# Altium PCB 封装.pcbdoc
Units mil, origin at the board's own origin, x right, y up, seen from the top; angles counter-clockwise.
Board outline 2850 x 1947.6 mil, 4 copper layers (Top Layer, Inner1, Inner2, Bottom Layer); 3 components, 86 nets, 100 pads, 0 vias.
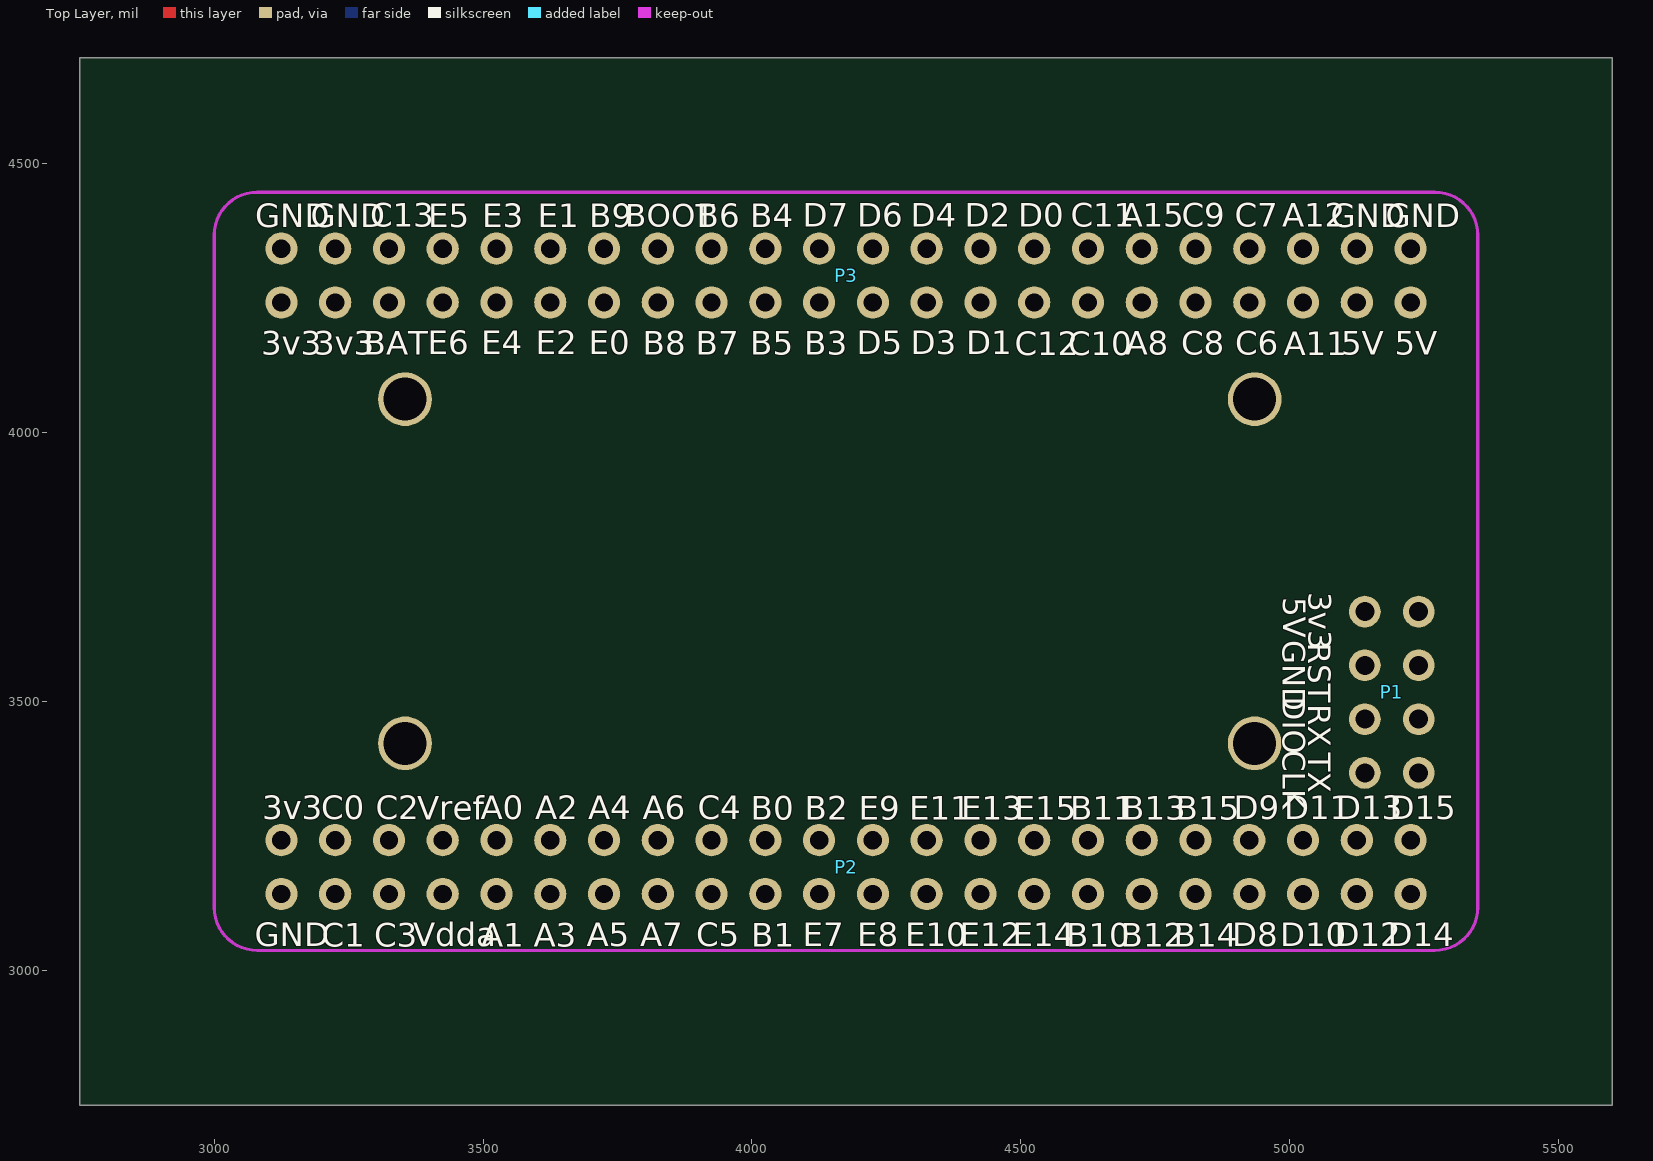
[diagram p0: Top Layer view]
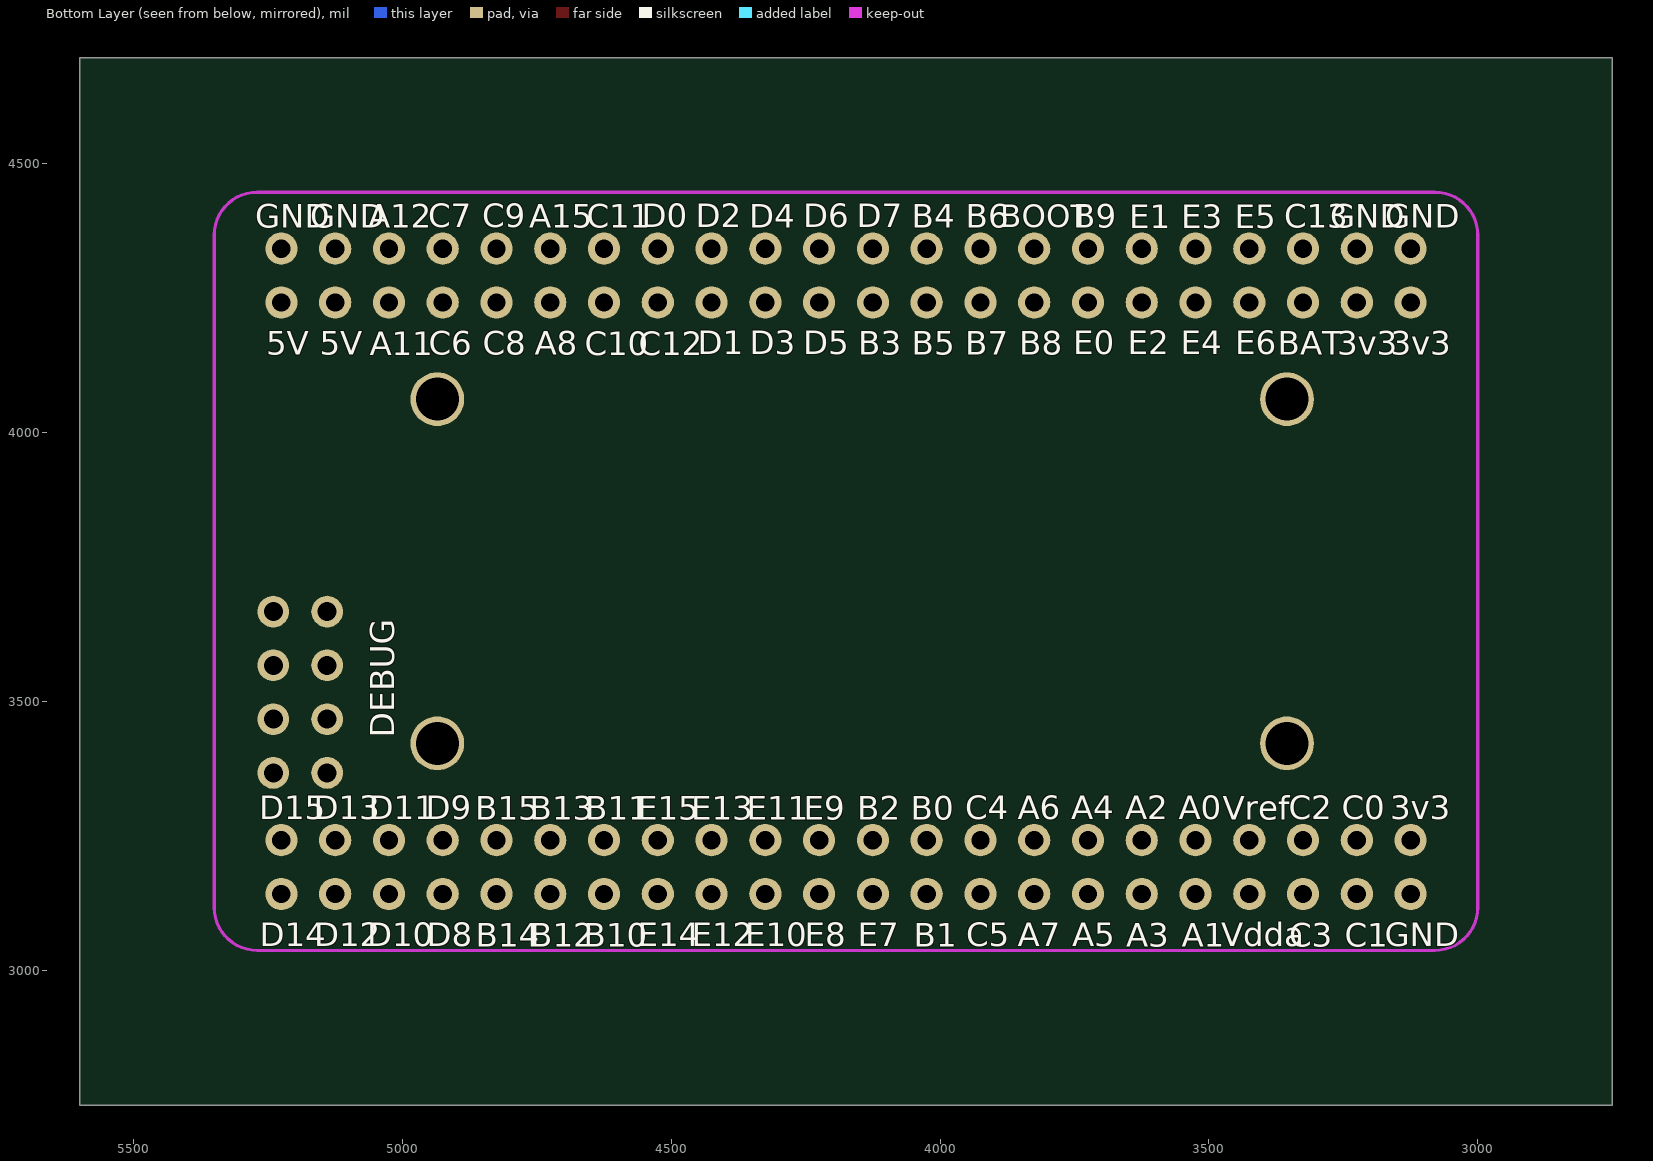
[diagram p1: Bottom Layer view, seen from below]

## Layer stack, top to bottom
Top Layer: signal copper (thickness not stored)
Dielectric: dielectric 12.6, FR-4, Dk 4.8
Inner1: signal copper (thickness not stored)
Dielectric: dielectric 12.6, FR-4, Dk 4.8
Inner2: signal copper (thickness not stored)
Dielectric: dielectric 12.6, FR-4, Dk 4.8
Bottom Layer: signal copper (thickness not stored)

## Board outline
5600,2750 2750,2750 2750,4697.6 5600,4697.6

## Design rules (kind name [scope] priority, off if disabled: settings)
Clearance copperThickness1oz [All] p1: gap=7 ignorepadtopadclearanceinfootprint=FALSE except(4: Track-Track; 5: Track-SMDPad SMDPad-SMDPad Track-THPad SMDPad-THPad THPad-THPad Track-Hole SMDPad-Hole THPad-Hole; 6: Track-Via SMDPad-Via THPad-Via Via-Via Track-Fill SMDPad-Fill THPad-Fill Via-Fill Fill-Fill SMDPad-Region THPad-Region Via-Region Fill-Region Region-Region Track-Poly SMDPad-Poly THPad-Poly Via-Poly Fill-Poly Poly-Poly Track-Text SMDPad-Text THPad-Text Via-Text Fill-Text Region-Text Poly-Text Text-Text Via-Hole Fill-Hole Region-Hole Poly-Hole Text-Hole; 11.8: Track-Region Region-Poly Track-Sheet SMDPad-Sheet THPad-Sheet Via-Sheet Fill-Sheet Region-Sheet Poly-Sheet Text-Sheet Sheet-Hole)
Clearance copperThickness2oz [All] p1: gap=7 ignorepadtopadclearanceinfootprint=FALSE except(6: Track-SMDPad SMDPad-SMDPad Track-THPad SMDPad-THPad THPad-THPad Track-Via SMDPad-Via THPad-Via Via-Via Track-Fill SMDPad-Fill THPad-Fill Via-Fill Fill-Fill SMDPad-Region THPad-Region Via-Region Fill-Region Region-Region Track-Poly SMDPad-Poly THPad-Poly Via-Poly Fill-Poly Poly-Poly Track-Text SMDPad-Text THPad-Text Via-Text Fill-Text Region-Text Poly-Text Text-Text Track-Hole SMDPad-Hole THPad-Hole Via-Hole Fill-Hole Region-Hole Poly-Hole Text-Hole; 8: Track-Track; 11.8: Track-Region Region-Poly Track-Sheet SMDPad-Sheet THPad-Sheet Via-Sheet Fill-Sheet Region-Sheet Poly-Sheet Text-Sheet Sheet-Hole)
DiffPairsRouting differentialPair [All] p1: maxuncoupledlength=10 maxlimit=6 mostfreqgap=6 toplayer_minwidth=5 toplayer_prefwidth=10 toplayer_maxwidth=100 bottomlayer_minwidth=5 bottomlayer_prefwidth=10 bottomlayer_maxwidth=100 midlayer1_minwidth=5 midlayer1_prefwidth=10 midlayer1_maxwidth=100 midlayer2_minwidth=5 midlayer2_prefwidth=10 midlayer2_maxwidth=100
PasteMaskExpansion pasteMaskExpansion [All] p1:
PlaneConnect innerPlane [All] p1: planeconnectstyle=Relief reliefexpansion=20 reliefentries=4 reliefconductorwidth=10 reliefairgap=10
PolygonConnect copperRegion [All] p1: connectstyle=Relief reliefentries=4 reliefconductorwidth=6 polygonreliefangle="90 Angle" airgapwidth=6
RoutingVias viaSize [All] p1: viastyle="Through Hole" holewidth=11.8 minholewidth=11.8 maxholewidth=248 width=17.7 minwidth=17.7 maxwidth=393.7
SolderMaskExpansion solderMaskExpansion [All] p1: useseparateexpansions=TRUE expansion=2 expansionbottom=2
Width copperThickness1oz [All] p1: maxlimit=100 minlimit=5 preferedwidth=10
Width copperThickness2oz [All] p1: maxlimit=100 minlimit=8 preferedwidth=10

## Components (designator, comment, footprint, x,y, rotation, side; value= is the part's Value field where it differs from the comment)
P1 "Header-Male-2.54_2x4" "HEADER 2*4" 5240,3367.6 r90 top
P2 "Header 2x22" "header 2x22" 4175,3192.6 r90 top
P3 "Header 2x22" "header 2x22" 4175,4292.6 r90 top

## Footprints (in the part's own frame and the unit in brackets; to place one, negate y for a bottom-side part, rotate by r counter-clockwise, add the part's x,y. Pads: shape width x height; smd on the part's side, far side on the other; paste and mask are expansions set on the pad)
"HEADER 2*4" [mm]
  round 1.5 hole 0.9: 1(0,0) 2(0,2.54) 3(2.54,0) 4(2.54,2.54) 5(5.08,0) 6(5.08,2.54) 7(7.62,0) 8(7.62,2.54)
"header 2x22" [mil]
  round 60 hole 34: 1(-50,1050) 2(50,1050) 3(-50,950) 4(50,950) 5(-50,850) 6(50,850) 7(-50,750) 8(50,750) 9(-50,650) 10(50,650) 11(-50,550) 12(50,550) 13(-50,450) 14(50,450) 15(-50,350) 16(50,350) 17(-50,250) 18(50,250) 19(-50,150) 20(50,150) 21(-50,50) 22(50,50) 23(-50,-50) 24(50,-50) 25(-50,-150) 26(50,-150) 27(-50,-250) 28(50,-250) 29(-50,-350) 30(50,-350) 31(-50,-450) 32(50,-450) 33(-50,-550) 34(50,-550) 35(-50,-650) 36(50,-650) 37(-50,-750) 38(50,-750) 39(-50,-850) 40(50,-850) 41(-50,-950) 42(50,-950) 43(-50,-1050) 44(50,-1050)

## Free pads (board coordinates)
  round 100 hole 80: 1(3355,3422.6) 1(3355,4062.6) 1(4935,3422.6) 1(4935,4062.6)

## Nets (pads, with @x,y where several pads share a name; then routed paths per layer and width w, separated by ;. In a path a pad name is that pad's centre, name@x,y a point inside that pad or via, vN(x,y) a via of type N, cw(c..) or ccw(c..) an arc to the next point about the centre after c; other vN are vias at no path point)
3V3: P1.7 P2.2 P3.1 P3.3
5V: P1.8 P3.41 P3.43
BAT: P3.5
BOOT: P3.16
EXT_ADC_CH1: P2.9
EXT_ADC_CH2: P2.10
EXT_I2C_SCL: P3.15
EXT_I2C_SDA: P3.14
EXT_RX: P3.13
EXT_SPI1_MISO: P3.8
EXT_SPI1_MOSI: P3.7
EXT_SPI1_SCK: P3.11
EXT_SPI2_MISO: P2.16
EXT_SPI2_MOSI: P2.15
EXT_SPI2_SCK: P2.13
EXT_TX: P3.12
GND: 
LED1: P2.4
LED2: P2.3
LED3: P2.6
NRST: P1.5
PA2: P2.12
PA3: P2.11
PA4: P2.14
PA8: P3.33
PA9: P1.1
PA10: P1.3
PA11: P3.39
PA12: P3.40
PA13: P1.4
PA14: P1.2
PA15: P3.34
PB0: P2.20
PB1: P2.19
PB2: P2.22
PB3: P3.21
PB4: P3.20
PB5: P3.19
PB6: P3.18
PB7: P3.17
PB10: P2.31
PB11: P2.32
PB12: P2.33
PB13: P2.34
PB14: P2.35
PB15: P2.36
PC3: P2.5
PC4: P2.18
PC5: P2.17
PC6: P3.37
PC7: P3.38
PC8: P3.35
PC9: P3.36
PC10: P3.31
PC11: P3.32
PC12: P3.29
PC13: P3.6
PD0: P3.30
PD1: P3.27
PD2: P3.28
PD3: P3.25
PD4: P3.26
PD5: P3.23
PD6: P3.24
PD7: P3.22
PD8: P2.37
PD9: P2.38
PD10: P2.39
PD11: P2.40
PD12: P2.41
PD13: P2.42
PD14: P2.43
PD15: P2.44
PE3: P3.10
PE4: P3.9
PE7: P2.21
PE8: P2.23
PE9: P2.24
PE10: P2.25
PE11: P2.26
PE12: P2.27
PE13: P2.28
PE14: P2.29
PE15: P2.30
VDDA: P2.7
VREF: P2.8
pads on no net: P1.6 P2.1 P3.2 P3.4 P3.42 P3.44

## Keep-outs
Board Outline Layer:
  lines w6: 3000,3117.6 3000,4367.6 cw(c3080,4367.6) 3080,4447.6 5270,4447.6 cw(c5270,4367.6) 5350,4367.6 5350,3117.6 cw(c5270,3117.6) 5270,3037.6 3080,3037.6 cw(c3080,3117.6) 3000,3117.6

## Silkscreen, mask and mechanical layers (free items; w line width, h text height)
Top Silkscreen Layer:
  text "BOOT" at 3764.89,4383.58 h42
  text "C7" at 4898.39,4383.6 h44
  text "GND" at 3076.56,4382.71 h44
  text "GND" at 3179.56,4382.71 h44
  text "C13" at 3289.89,4382.84 h44
  text "B9" at 3697.32,4382.58 h44
  text "B6" at 3897.82,4382.58 h44
  text "B4" at 3996.99,4382.58 h44
  text "D7" at 4094.76,4382.96 h44
  text "D6" at 4195.89,4382.96 h44
  text "D4" at 4295.02,4382.84 h44
  text "D2" at 4395.96,4382.96 h44
  text "D0" at 4495.12,4382.96 h44
  text "C11" at 4592.89,4382.84 h44
  text "A15" at 4685.82,4382.84 h44
  text "C9" at 4799.02,4383.35 h44
  text "A12" at 4986.39,4382.84 h44
  text "GND" at 5076.56,4382.71 h44
  text "GND" at 5178.56,4382.71 h44
  text "E5" at 3398.02,4381.95 h44
  text "E3" at 3498.76,4381.95 h44
  text "E1" at 3601.82,4381.95 h44
  text "E6" at 3397.62,4146 h44
  text "E4" at 3496.75,4146 h44
  text "E2" at 3597.72,4146 h44
  text "E0" at 3696.89,4146 h44
  text "D5" at 4194.55,4146 h44
  text "D3" at 4295.29,4146 h44
  text "D1" at 4398.32,4146 h44
  text "5V" at 5095.72,4145.6 h44
  text "5V" at 5195.72,4145.6 h44
  text "3v3" at 3087.39,4144.87 h44
  text "3v3" at 3186.39,4144.87 h44
  text "BAT" at 3278.09,4144.93 h44
  text "B8" at 3796.75,4145.07 h44
  text "B7" at 3895.82,4145.33 h44
  text "B5" at 3996.49,4145.2 h44
  text "B3" at 4097.22,4144.93 h44
  text "C10" at 4587.95,4144.67 h44
  text "A8" at 4695.15,4145.07 h44
  text "C8" at 4798.42,4145.07 h44
  text "C6" at 4898.62,4145.47 h44
  text "A11" at 4988.75,4144.53 h44
  text "C12" at 4488.82,4144.4 h44
  text "3v3" at 5035.23,3703.6 h42 r270
  text "5V" at 4988,3694.02 h42 r270
  text "GND" at 4987.62,3614.22 h42 r270
  text "RST" at 5035.1,3609.6 h42 r270
  text "DIO" at 4987.49,3509.62 h42 r270
  text "RX" at 5034.51,3495.71 h42 r270
  text "CLK" at 4987.49,3410.02 h42 r270
  text "TX" at 5034.49,3404.87 h42 r270
  text "3v3" at 3089.02,3281.87 h44
  text "C2" at 3300.36,3281.67 h44
  text "A2" at 3597.06,3281.67 h44
  text "C0" at 3199.52,3281.27 h44
  text "A0" at 3496.19,3281.27 h44
  text "A4" at 3696.12,3281.14 h44
  text "A6" at 3796.99,3281.27 h44
  text "C4" at 3899.42,3281.14 h44
  text "B0" at 3997.86,3280.87 h44
  text "B2" at 4098.66,3280.87 h44
  text "B11" at 4591.99,3280.87 h44
  text "B13" at 4688.99,3280.87 h44
  text "B15" at 4788.19,3280.87 h44
  text "D9" at 4896.12,3281.27 h44
  text "D11" at 4990.06,3281.21 h44
  text "D13" at 5087.02,3281.21 h44
  text "D15" at 5186.26,3281.21 h44
  text "Vref" at 3377.79,3280.34 h44
  text "E9" at 4198.76,3280.21 h44
  text "E11" at 4292.66,3280.21 h44
  text "E13" at 4389.62,3280.21 h44
  text "E15" at 4488.86,3280.21 h44
  text "GND" at 3075.03,3045.6 h44
  text "E7" at 4094.83,3045.6 h44
  text "E8" at 4195.77,3045.6 h44
  text "E10" at 4285.3,3045.6 h44
  text "E12" at 4386.13,3045.6 h44
  text "E14" at 4485.2,3045.6 h44
  text "D8" at 4893.17,3045.6 h44
  text "D10" at 4982.7,3045.6 h44
  text "D12" at 5083.57,3045.6 h44
  text "D14" at 5182.63,3045.6 h44
  text "Vdda" at 3370.53,3045.2 h44
  text "A5" at 3693.2,3044.8 h44
  text "A7" at 3792.57,3044.93 h44
  text "C5" at 3896.5,3044.8 h44
  text "B1" at 3998.63,3044.53 h44
  text "B10" at 4584.63,3044.53 h44
  text "B12" at 4685.5,3044.53 h44
  text "B14" at 4784.57,3044.53 h44
  text "C1" at 3200.3,3044 h44
  text "C3" at 3297.23,3044.47 h44
  text "A1" at 3496.97,3044.13 h44
  text "A3" at 3593.97,3044.47 h44
Bottom Silkscreen Layer:
  text "BOOT" at 3888.19,4382.58 h42
  text "C7" at 4951.72,4382.6 h44
  text "GND" at 3172.56,4381.71 h44
  text "GND" at 3274.56,4381.71 h44
  text "C13" at 3360.22,4381.84 h44
  text "B9" at 3752.79,4381.58 h44
  text "B6" at 3952.29,4381.58 h44
  text "B4" at 4053.12,4381.58 h44
  text "D7" at 4155.36,4381.96 h44
  text "D6" at 4254.22,4381.96 h44
  text "D4" at 4355.09,4381.84 h44
  text "D2" at 4454.16,4381.96 h44
  text "D0" at 4554.99,4381.96 h44
  text "C11" at 4657.22,4381.84 h44
  text "A15" at 4764.29,4381.84 h44
  text "C9" at 4851.09,4382.35 h44
  text "A12" at 5063.72,4381.84 h44
  text "GND" at 5171.56,4381.71 h44
  text "GND" at 5273.56,4381.71 h44
  text "E5" at 3452.09,4380.95 h44
  text "E3" at 3551.36,4380.95 h44
  text "E1" at 3648.29,4380.95 h44
  text "E6" at 3451.52,4146 h44
  text "E4" at 3552.39,4146 h44
  text "E2" at 3651.42,4146 h44
  text "E0" at 3752.25,4146 h44
  text "D5" at 4254.59,4146 h44
  text "D3" at 4353.85,4146 h44
  text "D1" at 4450.82,4146 h44
  text "5V" at 5153.42,4145.6 h44
  text "5V" at 5253.42,4145.6 h44
  text "3v3" at 3161.75,4144.87 h44
  text "3v3" at 3261.75,4144.87 h44
  text "BAT" at 3372.05,4144.93 h44
  text "B8" at 3852.39,4145.07 h44
  text "B7" at 3953.32,4145.33 h44
  text "B5" at 4052.65,4145.2 h44
  text "B3" at 4151.92,4144.93 h44
  text "C10" at 4661.19,4144.67 h44
  text "A8" at 4753.99,4145.07 h44
  text "C8" at 4850.72,4145.07 h44
  text "C6" at 4950.52,4145.47 h44
  text "A11" at 5060.39,4144.53 h44
  text "C12" at 4560.32,4144.4 h44
  text "DEBUG" at 5015,3432.6 h45 r270
  text "3v3" at 3163.27,3281.87 h44
  text "C2" at 3351.94,3281.67 h44
  text "A2" at 3655.24,3281.67 h44
  text "C0" at 3252.77,3281.27 h44
  text "A0" at 3556.11,3281.27 h44
  text "A4" at 3756.17,3281.14 h44
  text "A6" at 3855.31,3281.27 h44
  text "C4" at 3952.87,3281.14 h44
  text "B0" at 4054.44,3280.87 h44
  text "B2" at 4153.64,3280.87 h44
  text "B11" at 4660.31,3280.87 h44
  text "B13" at 4763.31,3280.87 h44
  text "B15" at 4864.11,3280.87 h44
  text "D9" at 4956.17,3281.27 h44
  text "D11" at 5062.24,3281.21 h44
  text "D13" at 5165.27,3281.21 h44
  text "D15" at 5266.04,3281.21 h44
  text "Vref" at 3474.51,3280.34 h44
  text "E9" at 4253.54,3280.21 h44
  text "E11" at 4359.64,3280.21 h44
  text "E13" at 4462.67,3280.21 h44
  text "E15" at 4563.44,3280.21 h44
  text "GND" at 3172.7,3045.6 h44
  text "E7" at 4152.9,3045.6 h44
  text "E8" at 4251.97,3045.6 h44
  text "E10" at 4362.43,3045.6 h44
  text "E12" at 4461.6,3045.6 h44
  text "E14" at 4562.53,3045.6 h44
  text "D8" at 4954.57,3045.6 h44
  text "D10" at 5065.03,3045.6 h44
  text "D12" at 5164.17,3045.6 h44
  text "D14" at 5265.1,3045.6 h44
  text "Vdda" at 3477.2,3045.2 h44
  text "A5" at 3754.53,3044.8 h44
  text "A7" at 3855.17,3044.93 h44
  text "C5" at 3951.23,3044.8 h44
  text "B1" at 4049.1,3044.53 h44
  text "B10" at 4663.1,3044.53 h44
  text "B12" at 4762.23,3044.53 h44
  text "B14" at 4863.17,3044.53 h44
  text "C1" at 3247.43,3044 h44
  text "C3" at 3350.5,3044.47 h44
  text "A1" at 3550.77,3044.13 h44
  text "A3" at 3653.77,3044.47 h44